# EAGLE board xyz (EAGLE 9.0.1)

No outline drawn. Coordinates in mm, seen from the top.
Copper layers (1*16): Top 0.035mm / dielectric 1.5mm / Bottom 0.035mm
Design rules "default": minimum track width 6mil, minimum drill 0.35mm, track to track 6mil, track to pad 6mil, pad to pad 6mil, via to via 6mil, smd to smd 6mil, copper to edge 40mil, drill to drill 6mil, minimum pad ring 10mil, minimum via ring 8mil, stop-mask expansion 4mil, vias tented up to drill 0mil, thermal gap 10mil

## Footprints (pad centres in the part's own frame; a part is rotated, then mirrored left to right if it is on the bottom)
NANO = drill 0.8 long: 3.3V -10.16,24.13; 5V -10.16,-1.27; A0 -10.16,19.05; A1 -10.16,16.51; A2 -10.16,13.97; A3 -10.16,11.43; A4 -10.16,8.89; A5 -10.16,6.35; A6 -10.16,3.81; A7 -10.16,1.27; AREF -10.16,21.59; D2 5.08,1.27; D3 5.08,3.81; D4 5.08,6.35; D5 5.08,8.89; D6 5.08,11.43; D7 5.08,13.97; D8 5.08,16.51; D9 5.08,19.05; D10 5.08,21.59; D11 5.08,24.13; D12 5.08,26.67; D13 -10.16,26.67; GND -10.16,-6.35; GND1 5.08,-1.27; RAW -10.16,-8.89; RST -10.16,-3.81; RST1 5.08,-3.81; RX1 5.08,-6.35; TX0 5.08,-8.89 | drill 0.8: ICSP1 -5.08,-10.16; ICSP2 -5.08,-7.62; ICSP3 -2.54,-10.16; ICSP4 -2.54,-7.62; ICSP5 0,-10.16; ICSP6 0,-7.62
RFID-RC522 = drill 1.016 long: 3V3 -8.89,0; GND -3.81,0; IRQ -1.27,0; MISO 1.27,0; MOSI 3.81,0; RST -6.35,0; SCK 6.35,0; SS 8.89,0
MA04-1 = drill 1.016 long: 1 -3.81,0; 2 -1.27,0; 3 1.27,0; 4 3.81,0
LED3MM = drill 0.813 pad 1.676 octagon: A -1.27,0; K 1.27,0

## Placement (x,y rotation side)
E$1  [NANO]  22.86,78.74 180 bottom
E$2  [RFID-RC522]  64.77,95.25 0 top
E$3  [MA04-1]  26.67,92.71 0 top
LED1  [LED3MM]  -52.07,13.97 0 top
LED2  [LED3MM]  -52.07,-3.81 0 top
M1  [RFID-RC522]  -43.18,95.25 0 top
SV1  [MA04-1]  -50.8,30.48 0 top
SV2  [MA04-1]  -50.8,-20.32 0 top
U$1  NANO  [NANO]  -6.35,55.88 0 top

## Library data of the parts
E$1 U$1 = Arduino-clone
E$2 M1 = mfrc522-module
E$3 = con-lstb
LED1 LED2 = adafruit
SV1 SV2 = con-lstb; OC_FARNELL: unknown; OC_NEWARK: unknown

## Nets
N$1: M1.3V3 U$1.3.3V
N$2: LED1.K LED2.K M1.GND U$1.GND1
N$3: M1.RST U$1.D9
N$4: M1.MISO U$1.D12
N$5: M1.MOSI U$1.D11
N$6: M1.SCK U$1.D13
N$7: U$1.D10
N$8: SV1.4 SV2.4 U$1.GND
N$9: SV1.3 U$1.5V
N$10: SV1.2 U$1.A4
N$11: SV1.1 U$1.A5
N$13: LED1.A
N$14: LED2.A
N$15: U$1.D3
N$16: U$1.D4
N$18: SV2.1 U$1.D5

## Tracks (layer width: path | path; a pad name or v marks a point on that pad's centre or on a via)
N$1  (1 unrouted)
N$2  (3 unrouted)
N$3  (1 unrouted)
N$4  (1 unrouted)
N$5  (1 unrouted)
N$6  (1 unrouted)
N$8  (2 unrouted)
N$9  (1 unrouted)
N$10  (1 unrouted)
N$11  (1 unrouted)
N$18  (1 unrouted)